# Altium PCB PowerModule.PcbDoc
Units mil, origin at the board's own origin, x right, y up, seen from the top; angles counter-clockwise.
Board outline 787.4 x 2125.98 mil, 2 copper layers (Top Layer, Bottom Layer); 46 components, 30 nets, 118 pads, 44 vias.
Unrouted connection lines stored in the file: 19.
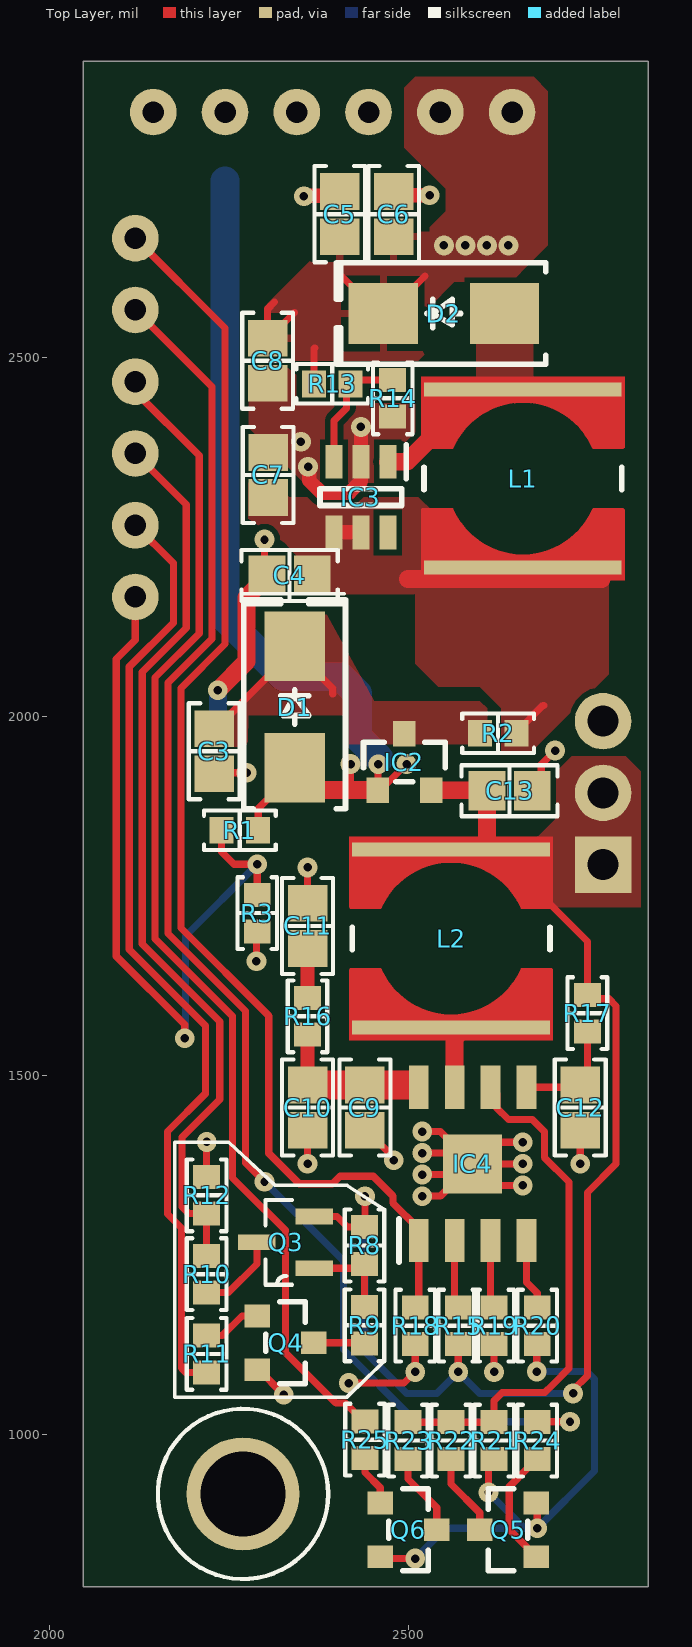
[diagram p0: Top Layer view]
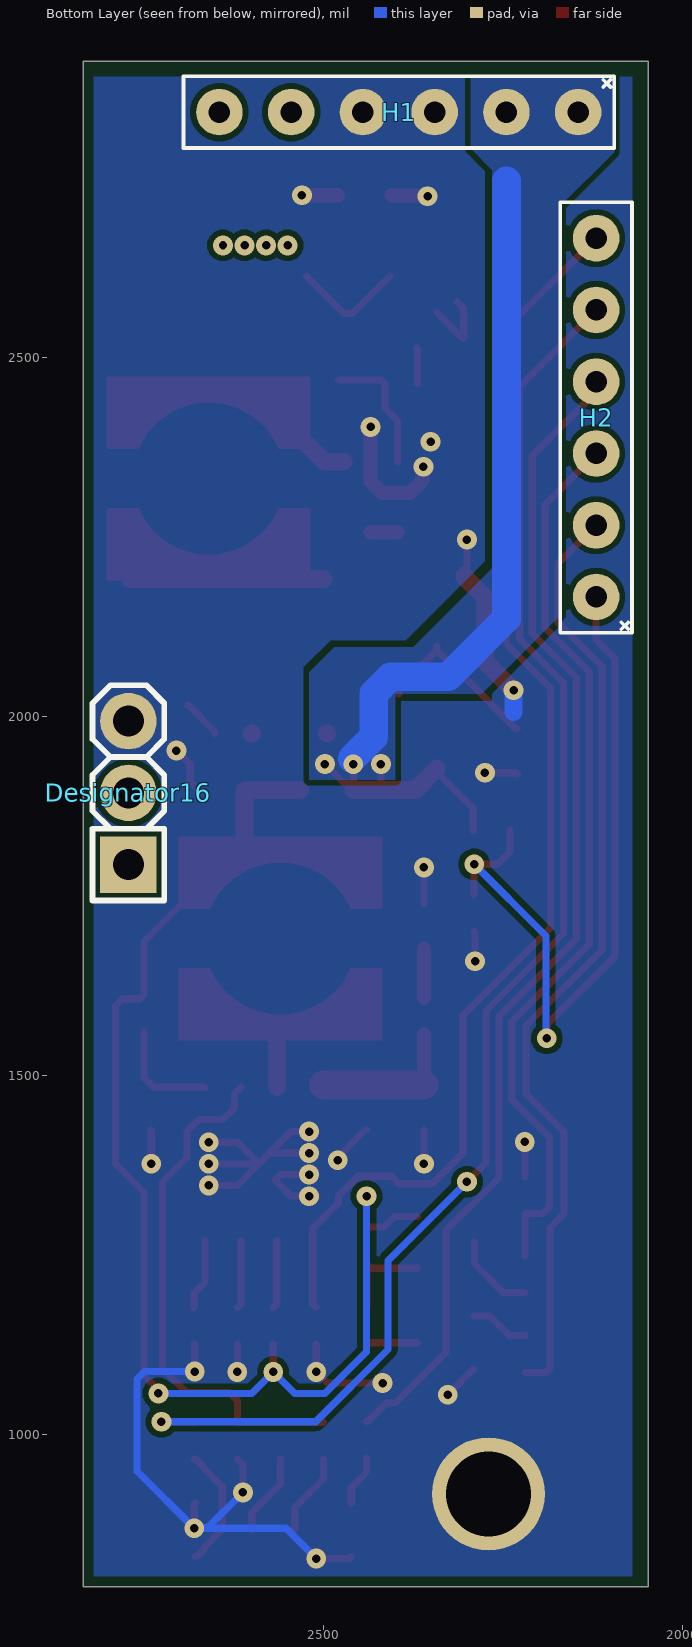
[diagram p1: Bottom Layer view, seen from below]
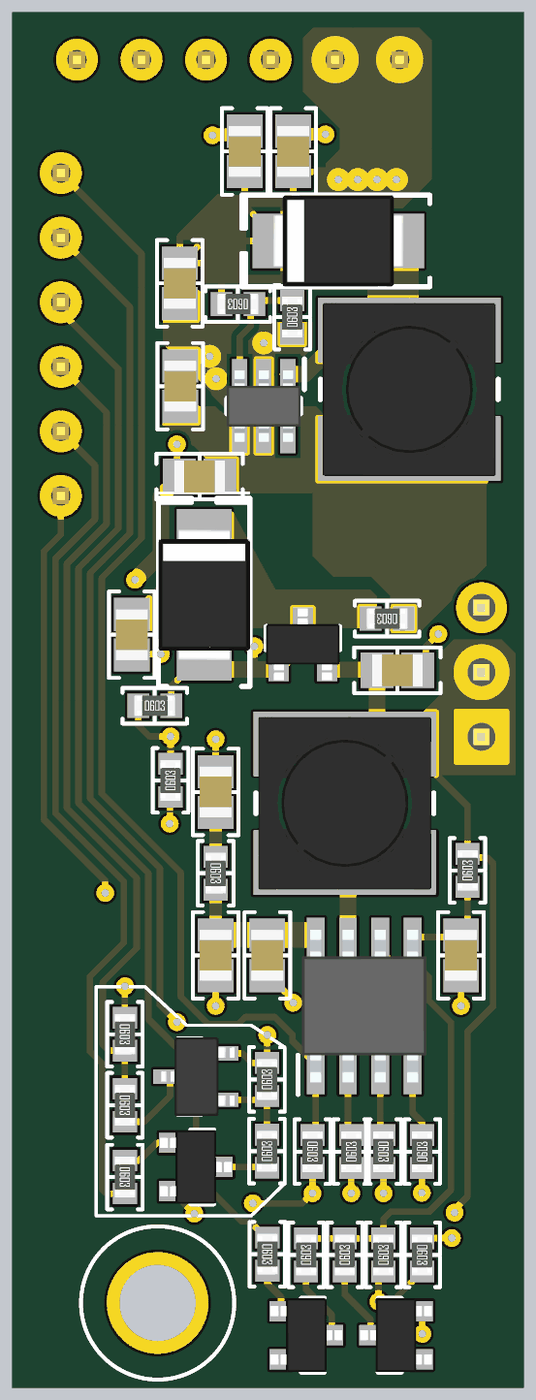
[diagram p2: 3D render of the assembled board from above, using the file's embedded part models]
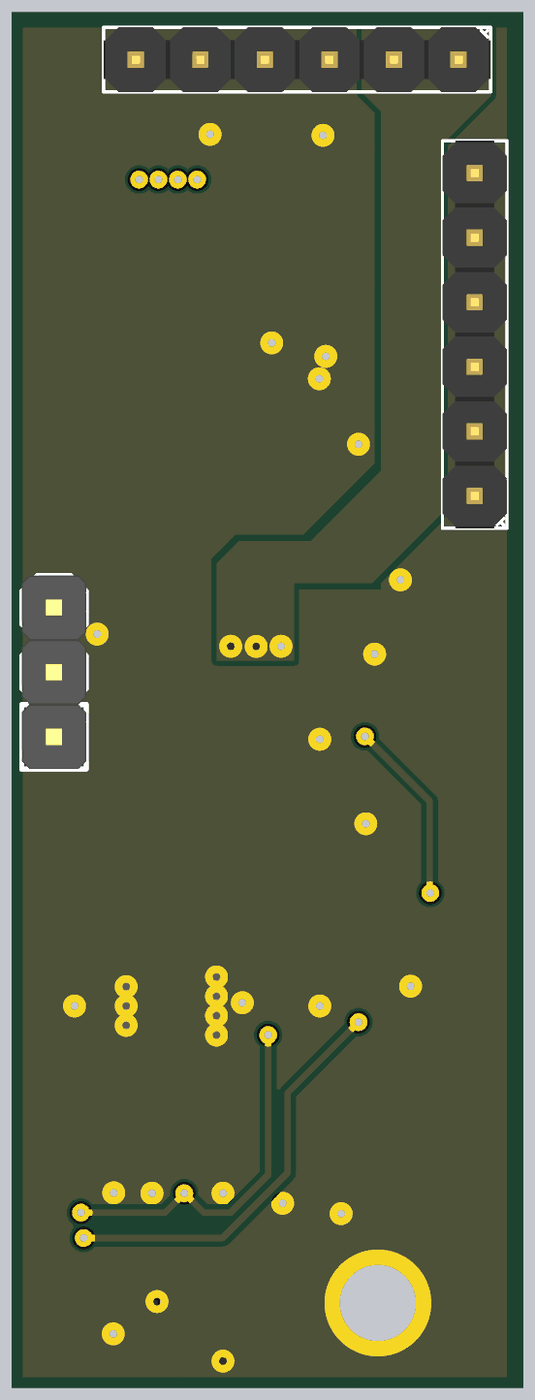
[diagram p3: 3D render of the assembled board from below, using the file's embedded part models]

## Layer stack, top to bottom
Top Solder: solder mask 0.4, Solder Resist, Dk 3.5
Top Layer: signal copper 1.4
Dielectric 1: dielectric 12.6, FR-4, Dk 4.8
Bottom Layer: signal copper 1.4
Bottom Solder: solder mask 0.4, Solder Resist, Dk 3.5

## Board outline
2047.24,787.4 2834.65,787.4 2834.65,2913.39 2047.24,2913.39

## Design rules (kind name [scope] priority, off if disabled: settings)
BoardOutlineClearance [All] p1: gap=10 ignorepadtopadclearanceinfootprint=FALSE except(0: Arc-SplitContinuation Track-SplitContinuation SMDPad-SplitContinuation THPad-SplitContinuation Via-SplitContinuation Fill-SplitContinuation Poly-SplitContinuation Region-SplitContinuation Text-SplitContinuation)
Clearance [All] p1: gap=8 ignorepadtopadclearanceinfootprint=FALSE
PolygonConnect PolygonConnect_7 [All vs IsNamedPolygon('NONET_L01_P-001')] p1: connectstyle=Direct reliefconductorwidth=10 reliefentries=4 polygonreliefangle="90 Angle" airgapwidth=10
PolygonConnect PolygonConnect_6 [All vs IsNamedPolygon('NONET_L01_P-001')] p2: thpad.connectstyle=Relief thpad.reliefconductorwidth=10 thpad.reliefentries=4 thpad.polygonreliefangle="90 Angle" thpad.airgapwidth=10 smdpad.connectstyle=Relief smdpad.reliefconductorwidth=10 smdpad.reliefentries=4 smdpad.polygonreliefangle="90 Angle" smdpad.airgapwidth=10 via.connectstyle=Direct via.reliefconductorwidth=10 via.reliefentries=4 via.polygonreliefangle="90 Angle" via.airgapwidth=10
PolygonConnect PolygonConnect_5 [All vs IsNamedPolygon('NONET_L01_P-001')] p3: thpad.connectstyle=Relief thpad.reliefconductorwidth=10 thpad.reliefentries=4 thpad.polygonreliefangle="90 Angle" thpad.airgapwidth=10 smdpad.connectstyle=Relief smdpad.reliefconductorwidth=10 smdpad.reliefentries=4 smdpad.polygonreliefangle="90 Angle" smdpad.airgapwidth=10 via.connectstyle=Direct via.reliefconductorwidth=10 via.reliefentries=4 via.polygonreliefangle="90 Angle" via.airgapwidth=10
PolygonConnect PolygonConnect_4 [All vs IsNamedPolygon('NONET_L01_P-001')] p4: thpad.connectstyle=Relief thpad.reliefconductorwidth=10 thpad.reliefentries=4 thpad.polygonreliefangle="90 Angle" thpad.airgapwidth=10 smdpad.connectstyle=Relief smdpad.reliefconductorwidth=10 smdpad.reliefentries=4 smdpad.polygonreliefangle="90 Angle" smdpad.airgapwidth=10 via.connectstyle=Direct via.reliefconductorwidth=10 via.reliefentries=4 via.polygonreliefangle="90 Angle" via.airgapwidth=10
PolygonConnect PolygonConnect_3 [All vs IsNamedPolygon('+5V_L01_P002')] p5: thpad.connectstyle=Relief thpad.reliefconductorwidth=10 thpad.reliefentries=4 thpad.polygonreliefangle="90 Angle" thpad.airgapwidth=10 smdpad.connectstyle=Relief smdpad.reliefconductorwidth=10 smdpad.reliefentries=4 smdpad.polygonreliefangle="90 Angle" smdpad.airgapwidth=10 via.connectstyle=Direct via.reliefconductorwidth=10 via.reliefentries=4 via.polygonreliefangle="90 Angle" via.airgapwidth=10
PolygonConnect PolygonConnect_2 [All vs IsNamedPolygon('NONET_L01_P-001')] p6: thpad.connectstyle=Relief thpad.reliefconductorwidth=10 thpad.reliefentries=4 thpad.polygonreliefangle="90 Angle" thpad.airgapwidth=10 smdpad.connectstyle=Relief smdpad.reliefconductorwidth=10 smdpad.reliefentries=4 smdpad.polygonreliefangle="90 Angle" smdpad.airgapwidth=10 via.connectstyle=Direct via.reliefconductorwidth=10 via.reliefentries=4 via.polygonreliefangle="90 Angle" via.airgapwidth=10
PolygonConnect PolygonConnect_1 [All vs IsNamedPolygon('+5V_L01_P002') Or IsNamedPolygon('+V_SYS_L01_P001') Or IsNamedPolygon('GND_L01_P006') Or IsNamedPolygon('NETD2_1_L01_P003')] p7: thpad.connectstyle=Relief thpad.reliefconductorwidth=10 thpad.reliefentries=4 thpad.polygonreliefangle="90 Angle" thpad.airgapwidth=10 smdpad.connectstyle=Direct smdpad.reliefconductorwidth=10 smdpad.reliefentries=4 smdpad.polygonreliefangle="90 Angle" smdpad.airgapwidth=10 via.connectstyle=Direct via.reliefconductorwidth=10 via.reliefentries=4 via.polygonreliefangle="90 Angle" via.airgapwidth=10
PolygonConnect [All] p8: connectstyle=Relief reliefconductorwidth=10 reliefentries=4 polygonreliefangle="90 Angle" airgapwidth=10
RoutingVias [All] p1: holewidth=11.81 width=27.56 viastyle="Through Hole" minholewidth=11.81 minwidth=27.56 maxholewidth=11.81 maxwidth=27.56
SolderMaskExpansion [All] p1: expansion=4 istentingtop=FALSE
Width [All] p1: maxlimit=40 minlimit=8 preferedwidth=10
30 further rules are at their usual default settings.

## Components (designator, comment, footprint, x,y, rotation, side; value= is the part's Value field where it differs from the comment)
C3 "10 µF" "CAP 0805_2012" 2229.85,1951.77 r90 top
C4 "1 µF" "CAP 0805_2012" 2334.85,2196.77 r0 top
C5 "1 µF" "CAP 0805_2012" 2404.85,2700.28 r270 top
C6 "1 µF" "CAP 0805_2012" 2479.85,2700.28 r270 top
C7 "22 µF" "CAP 0805_2012" 2304.85,2336.77 r270 top
C8 "22 µF" "CAP 0805_2012" 2304.26,2495.99 r90 top
C9 "10 µF" "CAP 0805_2012" 2439.85,1455.28 r90 top
C10 "22 µF" "CAP 0805_2012" 2359.85,1455.28 r90 top
C11 "10 µF" "CAP 0805_2012" 2359.85,1708.27 r270 top
C12 "22 µF" "CAP 0805_2012" 2739.85,1455.28 r90 top
C13 "22 µF" "CAP 0805_2012" 2641.35,1896.77 r180 top
D1 "SS24" "DO214AA SMB" 2341.95,2013.42 r90 top
D2 "SS24" "DO214AA SMB" 2549.85,2561.77 r180 top
Designator16 "Comment" "CON: PLS-3" 2771.65,1893.7 r90 bottom
H1 "arduino_header_6" header-6_male 2144.88,2842.52 r0 bottom
H2 "arduino_header_6" header-6_male 2119.85,2166.77 r90 bottom
IC2 "DMP1045U-7" "DIODES SOT-23-3" 2494.85,1936.77 r90 top
IC3 "MT3608" SOT95P280X145-6N 2434.26,2305.99 r270 top
IC4 "IP2312" SOIC127P600X165-9N 2589.85,1376.77 r90 top
L1 "3.3 µH" "BOURNS SRR6028" 2659.85,2331.77 r90 top
L2 "3.3 µH" "BOURNS SRR6028" 2559.85,1690.79 r90 top
Q3 "3906" SOT-23 2329.22,1267.4 r180 top
Q4 "MMBT3904-7-F" "DIODES SOT-23-3" 2329.22,1127.4 r0 top
Q5 "MMBT3904-7-F" "DIODES SOT-23-3" 2639.22,866.77 r180 top
Q6 "MMBT3904-7-F" "DIODES SOT-23-3" 2500.48,866.77 r0 top
R1 "10 kOhms" "RES 0603_1608" 2265.44,1841.77 r0 top
R2 "=Value" "RES 0603_1608" 2625.44,1976.77 r180 top
R3 "10 kOhms" "RES 0603_1608" 2289.85,1726.18 r90 top
R8 "10 kOhms" "RES 0603_1608" 2439.22,1262.99 r90 top
R9 "10 kOhms" "RES 0603_1608" 2439.22,1151.81 r90 top
R10 "7.5 kOhms" "RES 0603_1608" 2219.22,1222.99 r270 top
R11 "10 kOhms" "RES 0603_1608" 2219.22,1111.81 r270 top
R12 "2.7 kOhms" "RES 0603_1608" 2219.22,1332.99 r270 top
R13 "10 kOhms" "RES 0603_1608" 2394.26,2463.78 r180 top
R14 "1 kOhms" "RES 0603_1608" 2478.47,2443.71 r90 top
R15 "1 kOhms" "RES 0603_1608" 2569.85,1151.18 r90 top
R16 "2 Ohms" "RES 0603_1608" 2359.85,1582.36 r270 top
R17 "500 mOhms" "RES 0603_1608" 2749.85,1586.77 r90 top
R18 "1 kOhms" "RES 0603_1608" 2509.85,1151.18 r270 top
R19 "1 kOhms" "RES 0603_1608" 2619.85,1151.18 r270 top
R20 "51 kOhms" "RES 0603_1608" 2679.85,1151.18 r90 top
R21 "330 kOhms" "RES 0603_1608" 2619.85,991.18 r90 top
R22 "220 kOhms" "RES 0603_1608" 2559.85,991.18 r90 top
R23 "51 kOhms" "RES 0603_1608" 2499.85,991.18 r90 top
R24 "10 kOhms" "RES 0603_1608" 2679.85,991.18 r270 top
R25 "10 kOhms" "RES 0603_1608" 2439.85,992.36 r270 top

## Footprints (in the part's own frame and the unit in brackets; to place one, negate y for a bottom-side part, rotate by r counter-clockwise, add the part's x,y. Pads: shape width x height; smd on the part's side, far side on the other; paste and mask are expansions set on the pad)
"BOURNS SRR6028" [mm] "Precision Wire Wound Inductor, 2-Leads, Body 6.80x6.80mm, IPC Medium Density"
  rect 0.5x7 smd: 1(-3.15,0) 2(3.15,0)
  Top Layer region: -3.6,3.6 -1.1,3.6 -1.1,2.5 -1.4,2.4 -1.7,2.1 -1.9,2 -2.1,1.7 -2.3,1.4 -2.5,1 -2.6,0.7 -2.7,0.3 -2.7,0 -3.6,0
  Top Layer region: -3.6,-3.6 -1.1,-3.6 -1.1,-2.5 -1.4,-2.4 -1.7,-2.1 -1.9,-2 -2.1,-1.7 -2.3,-1.4 -2.5,-1 -2.6,-0.7 -2.7,-0.3 -2.7,0 -3.6,0
  Top Layer region: 3.6,-3.6 1.1,-3.6 1.1,-2.5 1.4,-2.4 1.7,-2.1 1.9,-2 2.1,-1.7 2.3,-1.4 2.5,-1 2.6,-0.7 2.7,-0.3 2.7,0 3.6,0
  Top Layer region: 3.6,3.6 1.1,3.6 1.1,2.5 1.4,2.4 1.7,2.1 1.9,2 2.1,1.7 2.3,1.4 2.5,1 2.6,0.7 2.7,0.3 2.7,0 3.6,0
  Top Layer lines w0.1: -1.1,3.55 -1.1,2.5 ccw(c0,0) -2.731,0 ccw(c0,0) -1.1,-2.5 -1.1,-3.55 ; 1.1,3.55 1.1,2.5 cw(c0,0) 2.731,0 cw(c0,0) 1.1,-2.5 1.1,-3.55
  silkscreen extent -0.4,-3.5 0.4,3.5, body extent -3.4,-3.4 3.4,3.4, height 2.8
"CAP 0805_2012" [mm] "Chip Capacitor, 2-Leads, Body 2.00x1.20mm, IPC Medium Density"
  rect 1.3x1.4 smd: 1(-0.8,0) 2(0.8,0)
  silkscreen extent -1.7,-0.9 1.7,0.9, body extent -1,-0.64 1,0.64, height 1.26
"CON: PLS-3" [mm]
  rect 2x2 hole 1.1: 1(-2.54,0)
  round 2 hole 1.1: 2(0,0) 3(2.54,0)
  silkscreen extent -3.81,-1.27 3.81,1.27, body extent -3.81,-1.27 3.81,1.27, height 8.54
"DIODES SOT-23-3" [mm] "SOT23, 3-Leads, Body 2.90x2.40mm, Pitch 0.95mm, IPC Medium Density"
  rect 0.9x0.8 smd: 1(-1,0.95) 2(-1,-0.95) 3(1,0)
  silkscreen extent -0.7,-1.45 0.7,1.45, body extent -1.41,-1.45 1.41,1.45, height 1.5
"DO214AA SMB" [mm] "Molded Diode, 2-Leads, Body 4.31x3.62mm, IPC Medium Density"
  rect 2.45x2.15 smd: 1(-2.15,0) 2(2.15,0)
  silkscreen extent -3.6,-1.8 3.8,1.8, body extent -2.6,-1.8 2.6,1.8, height 2.4
header-6_male [mil]
  round 65 hole 30: 1(0,0) 2(100,0) 3(200,0) 4(300,0) 5(400,0) 6(500,0)
  silkscreen extent -50,-50 550,50, body extent -50,-50 550,50, height 339
"RES 0603_1608" [mm] "Chip Resistor, 2-Leads, Body 1.60x0.80mm, IPC Medium Density"
  rect 0.85x0.95 smd: 1(-0.65,0) 2(0.65,0)
  silkscreen extent -1.27,-0.7 1.27,0.7, body extent -0.8,-0.4 0.8,0.4, height 0.45
SOIC127P600X165-9N [mm]
  rect 1.525x0.7 smd: 1(-2.712,1.905) 2(-2.712,0.635) 3(-2.712,-0.635) 4(-2.712,-1.905) 5(2.712,-1.905) 6(2.712,-0.635) 7(2.712,0.635) 8(2.712,1.905)
  rect 2.09x2.09 smd: 9(0,0)
  silkscreen extent -3.47,2.61 -1.95,2.61, body extent -3,-2.45 3,2.45, height 1.65
SOT95P280X145-6N [mm]
  rect 1.2x0.6 smd: 1(-1.25,0.95) 2(-1.25,0) 3(-1.25,-0.95) 4(1.25,-0.95) 5(1.25,0) 6(1.25,0.95)
  silkscreen extent -1.85,-1.45 0.3,1.6, body extent -1.4,-1.45 1.4,1.45, height 1.45
SOT-23 [mil]
  rect 52x22 smd: 1(-40,36) 2(-40,-36) 3(40,0)
  silkscreen extent -9,-59 28,59, body extent -60,-61 58,61, height 57

## Part data
C3 C9 C11: library part C0805C106K8PAC7800, "CAP CER 10UF 10V X5R 0805", Device Package="0805 (2012 Metric)", Manufacturer=KEMET, Operating Temperature="-55°C ~ 85°C", Supplier Part Number 1=399-C0805C106K8PAC7800CT-ND, Temperature Coefficient=X5R, Tolerance=±10%, Voltage - Rated=10V, Applications="Bypass, Decoupling", Capacitance="10 µF", ComponentLink1Description=Datasheet, ComponentLink1URL=https://connect.kemet.com:7667/gateway/IntelliData-ComponentDocumentation/1.0/download/datasheet/C0805C106K8PACTU, ComponentLink2Description="DigiKey Link", ComponentLink2URL=https://www.digikey.com/en/products/detail/kemet/C0805C106K8PAC7800/1090830, LastUpdated="9/14/2022 7:51:56 AM", Lifecycle Status=Active, Minimum Order=1, Mounting Type="Surface Mount, MLCC", Package / Case="0805 (2012 Metric)", Packaging=TapeAndReel, Part Number=C0805C106K8PAC7800, Part Status=Active, PartId=44790, Price=0.02, Series="SMD Comm X5R", Size / Dimension="0.079\" L x 0.049\" W (2.00mm x 1.25mm)", Supplier 1=DigiKey, Thickness (Max)="0.055\" (1.40mm)"
C4 C5 C6: library part C0805C105K4RAC7800, "CAP CER 1UF 16V X7R 0805", Device Package="0805 (2012 Metric)", Manufacturer=KEMET, Operating Temperature="-55°C ~ 125°C", Supplier Part Number 1=399-C0805C105K4RAC7800CT-ND, Temperature Coefficient=X7R, Tolerance=±10%, Voltage - Rated=16V, Applications="Bypass, Decoupling", Capacitance="1 µF", ComponentLink1Description=Datasheet, ComponentLink1URL=https://api.kemet.com/component-edge/download/datasheet/C0805C105K4RACTU.pdf, ComponentLink2Description="DigiKey Link", ComponentLink2URL=https://www.digikey.com/en/products/detail/kemet/C0805C105K4RAC7800/416047, LastUpdated="9/19/2022 1:03:30 PM", Lifecycle Status=Active, Minimum Order=1, Mounting Type="Surface Mount, MLCC", Package / Case="0805 (2012 Metric)", Packaging=TapeAndReel, Part Number=C0805C105K4RAC7800, Part Status=Active, PartId=32075, Price=0.01, Series="SMD Comm X7R", Size / Dimension="0.079\" L x 0.049\" W (2.00mm x 1.25mm)", Supplier 1=DigiKey, Thickness (Max)="0.039\" (1.00mm)"
C7 C8 C10 C12 C13: library part GRM21BR61E226ME44K, "CAP CER 22UF 25V X5R 0805", Device Package="0805 (2012 Metric)", Manufacturer="Murata Electronics", Operating Temperature="-55°C ~ 85°C", Supplier Part Number 1=490-14661-1-ND, Temperature Coefficient=X5R, Tolerance=±20%, Voltage - Rated=25V, Applications="General Purpose", Capacitance="22 µF", ComponentLink1Description=Datasheet, ComponentLink1URL=https://search.murata.co.jp/Ceramy/image/img/A01X/G101/ENG/GRM21BR61E226ME44-01.pdf, ComponentLink2Description="DigiKey Link", ComponentLink2URL=https://www.digikey.com/en/products/detail/murata-electronics/GRM21BR61E226ME44K/4905534, LastUpdated="2/9/2024 8:15:53 PM", Lifecycle Status=Active, Minimum Order=1, Mounting Type="Surface Mount, MLCC", Package / Case="0805 (2012 Metric)", Packaging=TapeAndReel, Part Number=GRM21BR61E226ME44K, Part Status=Active, PartId=39870, Price=0.05, Series=GRM, Size / Dimension="0.079\" L x 0.049\" W (2.00mm x 1.25mm)", Supplier 1=DigiKey, Thickness (Max)="0.057\" (1.45mm)"
D1 D2: "DIODE SCHOTTKY 40V 2A DO214AA", Current - Average Rectified (Io)=2A, Current - Reverse Leakage @ Vr="400µA @ 40V", Manufacturer="ON Semiconductor", Operating Temperature - Junction="-65°C ~ 125°C", Package / Case="DO-214AA, SMB", Supplier Device Package="DO-214AA (SMB)", Supplier Part Number 1=SS24FSCT-ND, Voltage - DC Reverse (Vr) (Max)=40V, Voltage - Forward (Vf) (Max) @ If="500mV @ 2A", ComponentLink1Description=Datasheet, ComponentLink1URL=https://www.onsemi.com/pub/Collateral/SS29-D.pdf, ComponentLink2Description="DigiKey Link", ComponentLink2URL=http://digikey.com/product-detail/en/on-semiconductor/SS24/SS24FSCT-ND/1626273, Diode Type=Schottky, LastUpdated="2/8/2024 9:26:46 PM", Lifecycle Status=Active, Minimum Order=1, Mounting Type="Surface Mount", Packaging=TapeAndReel, Part Number=SS24, Part Status=Active, PartId=1394, Price=0.10, Series=-, Speed="Fast Recovery =< 500ns, > 200mA (Io)", Supplier 1=DigiKey
IC2: "MOSFET P-CH 12V 4A SOT23", Current - Continuous Drain (Id) @ 25°C="4A (Ta)", Drain to Source Voltage (Vdss)="12 V", Drive Voltage (Max Rds On,  Min Rds On)="1.8V, 4.5V", Input Capacitance (Ciss) (Max) @ Vds="1357 pF @ 10 V", Manufacturer="Diodes Incorporated", Operating Temperature="-55°C ~ 150°C (TJ)", Package / Case="TO-236-3, SC-59, SOT-23-3", Power Dissipation (Max)="800mW (Ta)", Supplier Device Package=SOT-23-3, Supplier Part Number 1=DMP1045U-7DICT-ND, ComponentLink1Description=Datasheet, ComponentLink1URL=https://www.diodes.com/assets/Datasheets/DMP1045U.pdf, ComponentLink2Description="DigiKey Link", ComponentLink2URL=https://www.digikey.com/en/products/detail/diodes-incorporated/DMP1045U-7/4249936, FET Type=P-Channel, Gate Charge (Qg) (Max) @ Vgs="15.8 nC @ 4.5 V", LastUpdated="2/8/2024 9:46:13 PM", Lifecycle Status=Active, Minimum Order=1, Mounting Type="Surface Mount", Packaging=TapeAndReel, Part Number=DMP1045U-7, Part Status=Active, Price=0.07, Rds On (Max) @ Id, Vgs="31mOhm @ 4A, 4.5V", Series=-, Supplier 1=DigiKey, Technology="MOSFET (Metal Oxide)", Vgs (Max)=±8V, Vgs(th) (Max) @ Id="1V @ 250µA"
IC3: "Integrated Circuit", Manufacturer_Name=Aerosemi, Datasheet Link=https://www.olimex.com/Products/Breadboarding/BB-PWR-3608/resources/MT3608.pdf, Height=1.45mm, Manufacturer_Part_Number=MT3608
IC4: "Integrated Circuit", Manufacturer_Name=INJOINIC, Datasheet Link=http://www.injoinic.com/wwwroot/uploads/files/20230913/623558e526750db62e25e32800f94a6b.pdf, Height=1.65mm, Manufacturer_Part_Number=IP2312
L1 L2: library part SRR6028-3R3Y, "FIXED IND 3.3UH 2.5A 28 MOHM SMD", Current - Saturation=2.6A, Current Rating (Amps)="2.5 A", DC Resistance (DCR)="28mOhm Max", Device Package=Nonstandard, Frequency - Self Resonant=45MHz, Inductance Frequency - Test="100 kHz", Manufacturer="Bourns Inc.", Operating Temperature="-40°C ~ 125°C", Q @ Freq="10 @ 7.96MHz", Supplier Part Number 1=118-SRR6028-3R3YCT-ND, Tolerance=±30%, ComponentLink1Description=Datasheet, ComponentLink1URL=https://www.bourns.com/docs/Product-Datasheets/SRR6028.pdf, ComponentLink2Description="DigiKey Link", ComponentLink2URL=https://www.digikey.com/en/products/detail/bourns-inc/SRR6028-3R3Y/1970369, Height - Seated (Max)="0.118\" (3.00mm)", Inductance="3.3 µH", LastUpdated="2/8/2024 9:34:55 PM", Lifecycle Status=Active, Material - Core=Ferrite, Minimum Order=1, Mounting Type="Surface Mount", Package / Case=Nonstandard, Packaging=TapeAndReel, Part Number=SRR6028-3R3Y, Part Status=Active, PartId=57, Price=0.31, Series=SRR6028, Shielding=Shielded, Size / Dimension="0.268\" L x 0.268\" W (6.80mm x 6.80mm)", Supplier 1=DigiKey, Type="Drum Core, Wirewound"
Q3: library part MMBT3906
Q4 Q5 Q6: "TRANS NPN 40V 0.2A SOT23-3", Current - Collector (Ic) (Max)="200 mA", Current - Collector Cutoff (Max)="50nA (ICBO)", DC Current Gain (hFE) (Min) @ Ic, Vce="100 @ 10mA, 1V", Frequency - Transition=300MHz, Manufacturer="Diodes Incorporated", Operating Temperature="-55°C ~ 150°C (TJ)", Package / Case="TO-236-3, SC-59, SOT-23-3", Power - Max="300 mW", Supplier Device Package=SOT-23-3, Supplier Part Number 1=MMBT3904-FDICT-ND, Voltage - Collector Emitter Breakdown (Max)="40 V", ComponentLink1Description=Datasheet, ComponentLink1URL=https://www.diodes.com/assets/Datasheets/ds30036.pdf, ComponentLink2Description="DigiKey Link", ComponentLink2URL=https://www.digikey.com/en/products/detail/diodes-incorporated/MMBT3904-7-F/814494, LastUpdated="2/8/2024 9:54:04 PM", Lifecycle Status=Active, Minimum Order=1, Mounting Type="Surface Mount", Packaging=TapeAndReel, Part Number=MMBT3904-7-F, Part Status=Active, PartId=85, Price=0.01, Series=-, Supplier 1=DigiKey, Transistor Type=NPN, Vce Saturation (Max) @ Ib, Ic="300mV @ 5mA, 50mA"
R1 R3 R8 R9 R11 R13 R24 R25: library part RT0603FRE0710KL, "RES SMD 10K OHM 1% 1/10W 0603", Device Package="0603 (1608 Metric)", Manufacturer=Yageo, Operating Temperature="-55°C ~ 155°C", Power (Watts)="0.1W, 1/10W", Supplier Device Package=0603, Supplier Part Number 1=YAG2321CT-ND, Temperature Coefficient=±50ppm/°C, Tolerance=±1%, ComponentLink1Description=Datasheet, ComponentLink1URL=https://www.yageo.com/upload/media/product/productsearch/datasheet/rchip/PYu-RT_1-to-0.01_RoHS_L_11.pdf, ComponentLink2Description="DigiKey Link", ComponentLink2URL=http://digikey.com/product-detail/en/yageo/RT0603FRE0710KL/YAG2321CT-ND/5252435, Composition="Thin Film", Height - Seated (Max)="0.022\" (0.55mm)", LastUpdated="9/2/2020 1:10:23 AM", Lifecycle Status=Active, Minimum Order=1, Number of Terminations=2, Package / Case="0603 (1608 Metric)", Packaging=TapeAndReel, Part Number=RT0603FRE0710KL, Part Status=Active, PartId=5671, Price=0.01, Resistance="10 kOhms", Series=RT, Size / Dimension="0.063\" L x 0.031\" W (1.60mm x 0.80mm)", Supplier 1=DigiKey
R2: library part RCA06030000ZSEA, "RES SMD 0 OHM JUMPER 1/10W 0603", Device Package="0603 (1608 Metric)", Manufacturer="Vishay Dale", Operating Temperature="-55°C ~ 155°C", Power (Watts)="0.1W, 1/10W", Ratings=AEC-Q200, Supplier Device Package=0603, Supplier Part Number 1=541-2192-1-ND, Tolerance=Jumper, ComponentLink1Description=Datasheet, ComponentLink1URL=http://www.vishay.com/docs/20037/rcae3.pdf, ComponentLink2Description="DigiKey Link", ComponentLink2URL=http://digikey.com/product-detail/en/vishay-dale/RCA06030000ZSEA/541-2192-1-ND/4946845, Composition="Thick Film", Features="Anti-Sulfur, Automotive AEC-Q200", Height - Seated (Max)="0.020\" (0.50mm)", LastUpdated="9/2/2020 1:10:23 AM", Lifecycle Status=Active, Minimum Order=1, Number of Terminations=2, Package / Case="0603 (1608 Metric)", Packaging=TapeAndReel, Part Number=RCA06030000ZSEA, Part Status=Active, PartId=5740, Price=0.01, Series=RCA, Size / Dimension="0.061\" L x 0.033\" W (1.55mm x 0.85mm)", Supplier 1=DigiKey
R10: library part RC0603FR-077K5L, "RES 7.5K OHM 1% 1/10W 0603", Device Package="0603 (1608 Metric)", Manufacturer=Yageo, Operating Temperature="-55°C ~ 155°C", Power (Watts)="0.1W, 1/10W", Supplier Device Package=0603, Supplier Part Number 1=311-7.50KHRCT-ND, Temperature Coefficient=±100ppm/°C, Tolerance=±1%, ComponentLink1Description=Datasheet, ComponentLink1URL=https://www.yageo.com/upload/media/product/productsearch/datasheet/rchip/PYu-RC_Group_51_RoHS_L_10.pdf, ComponentLink2Description="DigiKey Link", ComponentLink2URL=https://www.digikey.com/en/products/detail/yageo/RC0603FR-077K5L/727366, Composition="Thick Film", Features="Moisture Resistant", Height - Seated (Max)="0.022\" (0.55mm)", LastUpdated="2/9/2024 8:42:41 PM", Lifecycle Status=Active, Minimum Order=1, Number of Terminations=2, Package / Case="0603 (1608 Metric)", Packaging=CutTape, Part Number=RC0603FR-077K5L, Part Status=Active, PartId=19041, Price=0.01, Resistance="7.5 kOhms", Series=RC_L, Size / Dimension="0.063\" L x 0.031\" W (1.60mm x 0.80mm)", Supplier 1=DigiKey
R12: library part RC0603FR-072K7L, "RES 2.7K OHM 1% 1/10W 0603", Device Package="0603 (1608 Metric)", Manufacturer=Yageo, Operating Temperature="-55°C ~ 155°C", Power (Watts)="0.1W, 1/10W", Supplier Device Package=0603, Supplier Part Number 1=311-2.70KHRCT-ND, Temperature Coefficient=±100ppm/°C, Tolerance=±1%, ComponentLink1Description=Datasheet, ComponentLink1URL=https://www.yageo.com/upload/media/product/productsearch/datasheet/rchip/PYu-RC_Group_51_RoHS_L_10.pdf, ComponentLink2Description="DigiKey Link", ComponentLink2URL=https://www.digikey.com/en/products/detail/yageo/RC0603FR-072K7L/727032, Composition="Thick Film", Features="Moisture Resistant", Height - Seated (Max)="0.022\" (0.55mm)", LastUpdated="2/9/2024 8:42:41 PM", Lifecycle Status=Active, Minimum Order=1, Number of Terminations=2, Package / Case="0603 (1608 Metric)", Packaging=CutTape, Part Number=RC0603FR-072K7L, Part Status=Active, PartId=19013, Price=0.01, Resistance="2.7 kOhms", Series=RC_L, Size / Dimension="0.063\" L x 0.031\" W (1.60mm x 0.80mm)", Supplier 1=DigiKey
R14: library part RT0603FRE071KL, "RES SMD 1K OHM 1% 1/10W 0603", Device Package="0603 (1608 Metric)", Manufacturer=Yageo, Operating Temperature="-55°C ~ 155°C", Power (Watts)="0.1W, 1/10W", Supplier Device Package=0603, Supplier Part Number 1=YAG2323CT-ND, Temperature Coefficient=±50ppm/°C, Tolerance=±1%, ComponentLink1Description=Datasheet, ComponentLink1URL=https://www.yageo.com/upload/media/product/productsearch/datasheet/rchip/PYu-RT_1-to-0.01_RoHS_L_11.pdf, ComponentLink2Description="DigiKey Link", ComponentLink2URL=https://www.digikey.com/en/products/detail/yageo/RT0603FRE071KL/1075188, Composition="Thin Film", Height - Seated (Max)="0.022\" (0.55mm)", LastUpdated="9/19/2022 1:22:31 PM", Lifecycle Status=Active, Minimum Order=1, Number of Terminations=2, Package / Case="0603 (1608 Metric)", Packaging=TapeAndReel, Part Number=RT0603FRE071KL, Part Status=Active, PartId=5672, Price=0.01, Resistance="1 kOhms", Series=RT, Size / Dimension="0.063\" L x 0.031\" W (1.60mm x 0.80mm)", Supplier 1=DigiKey
R15 R18 R19: library part RC0603JR-071KP, "RES 1K OHM 5% 1/10W 0603", Device Package="0603 (1608 Metric)", Manufacturer=Yageo, Operating Temperature="-55°C ~ 155°C", Power (Watts)="0.1W, 1/10W", Ratings="7C1 RoHS w/out Exemption (100% Pb-Free)", Supplier Device Package=0603, Supplier Part Number 1=YAG1311CT-ND, Temperature Coefficient=±100ppm/°C, Tolerance=±5%, ComponentLink1Description=Datasheet, ComponentLink1URL=http://www.yageo.com/NewPortal/yageodocoutput?fileName=/pdf/R-Chip/PYu-RC_51_RoHS_P_0.pdf, ComponentLink2Description="DigiKey Link", ComponentLink2URL=https://www.digikey.com/en/products/detail/yageo/RC0603JR-071KP/4935326, Composition="Thick Film", Features="Moisture Resistant", Height - Seated (Max)="0.022\" (0.55mm)", LastUpdated="2/9/2024 8:43:09 PM", Lifecycle Status=Active, Minimum Order=1, Number of Terminations=2, Package / Case="0603 (1608 Metric)", Packaging=TapeAndReel, Part Number=RC0603JR-071KP, Part Status=Active, PartId=11731, Price=0.01, Resistance="1 kOhms", Series=RC_P, Size / Dimension="0.063\" L x 0.031\" W (1.60mm x 0.80mm)", Supplier 1=DigiKey
R16: library part RC0603FR-072RL, "RES 2 OHM 1% 1/10W 0603", Device Package="0603 (1608 Metric)", Manufacturer=Yageo, Operating Temperature="-55°C ~ 155°C", Power (Watts)="0.1W, 1/10W", Supplier Device Package=0603, Supplier Part Number 1=311-2.00HRCT-ND, Temperature Coefficient=±200ppm/°C, Tolerance=±1%, ComponentLink1Description=Datasheet, ComponentLink1URL=https://www.yageo.com/upload/media/product/productsearch/datasheet/rchip/PYu-RC_Group_51_RoHS_L_10.pdf, ComponentLink2Description="DigiKey Link", ComponentLink2URL=https://www.digikey.com/en/products/detail/yageo/RC0603FR-072RL/727008, Composition="Thick Film", Features="Moisture Resistant", Height - Seated (Max)="0.022\" (0.55mm)", LastUpdated="2/9/2024 8:43:04 PM", Lifecycle Status=Active, Minimum Order=1, Number of Terminations=2, Package / Case="0603 (1608 Metric)", Packaging=TapeAndReel, Part Number=RC0603FR-072RL, Part Status=Active, PartId=12910, Price=0.01, Resistance="2 Ohms", Series=RC_L, Size / Dimension="0.063\" L x 0.031\" W (1.60mm x 0.80mm)", Supplier 1=DigiKey
R17: library part RL0603FR-070R5L, "RES 0.5 OHM 1% 1/10W 0603", Device Package="0603 (1608 Metric)", Manufacturer=Yageo, Operating Temperature="-55°C ~ 155°C", Power (Watts)="0.1W, 1/10W", Ratings=AEC-Q200, Supplier Device Package=0603, Supplier Part Number 1=311-.5QCT-ND, Temperature Coefficient=±800ppm/°C, Tolerance=±1%, ComponentLink1Description=Datasheet, ComponentLink1URL=http://www.yageo.com/documents/recent/PYu-RL_Group_521_RoHS_L_2.pdf, ComponentLink2Description="DigiKey Link", ComponentLink2URL=https://www.digikey.com/en/products/detail/yageo/RL0603FR-070R5L/3885517, Composition="Thick Film", Features="Automotive AEC-Q200, Current Sense, Moisture Resistant", Height - Seated (Max)="0.022\" (0.55mm)", LastUpdated="2/9/2024 8:43:08 PM", Lifecycle Status=Active, Minimum Order=1, Number of Terminations=2, Package / Case="0603 (1608 Metric)", Packaging=TapeAndReel, Part Number=RL0603FR-070R5L, Part Status=Active, PartId=12049, Price=0.03, Resistance="500 mOhms", Series=RL, Size / Dimension="0.063\" L x 0.031\" W (1.60mm x 0.80mm)", Supplier 1=DigiKey
R20 R23: library part RC0603FR-0751KL, "RES 51K OHM 1% 1/10W 0603", Device Package="0603 (1608 Metric)", Manufacturer=Yageo, Operating Temperature="-55°C ~ 155°C", Power (Watts)="0.1W, 1/10W", Supplier Device Package=0603, Supplier Part Number 1=311-51.0KHRCT-ND, Temperature Coefficient=±100ppm/°C, Tolerance=±1%, ComponentLink1Description=Datasheet, ComponentLink1URL=https://www.yageo.com/upload/media/product/productsearch/datasheet/rchip/PYu-RC_Group_51_RoHS_L_10.pdf, ComponentLink2Description="DigiKey Link", ComponentLink2URL=https://www.digikey.com/en/products/detail/yageo/RC0603FR-0751KL/727282, Composition="Thick Film", Features="Moisture Resistant", Height - Seated (Max)="0.022\" (0.55mm)", LastUpdated="2/9/2024 8:42:42 PM", Lifecycle Status=Active, Minimum Order=1, Number of Terminations=2, Package / Case="0603 (1608 Metric)", Packaging=CutTape, Part Number=RC0603FR-0751KL, Part Status=Active, PartId=18942, Price=0.01, Resistance="51 kOhms", Series=RC_L, Size / Dimension="0.063\" L x 0.031\" W (1.60mm x 0.80mm)", Supplier 1=DigiKey
R21: library part RC0603JR-07330KL, "RES 330K OHM 5% 1/10W 0603", Device Package="0603 (1608 Metric)", Manufacturer=Yageo, Operating Temperature="-55°C ~ 155°C", Power (Watts)="0.1W, 1/10W", Supplier Device Package=0603, Supplier Part Number 1=311-330KGRCT-ND, Temperature Coefficient=±100ppm/°C, Tolerance=±5%, ComponentLink1Description=Datasheet, ComponentLink1URL=https://www.yageo.com/upload/media/product/productsearch/datasheet/rchip/PYu-RC_Group_51_RoHS_L_10.pdf, ComponentLink2Description="DigiKey Link", ComponentLink2URL=https://www.digikey.com/en/products/detail/yageo/RC0603JR-07330KL/726770, Composition="Thick Film", Features="Moisture Resistant", Height - Seated (Max)="0.022\" (0.55mm)", LastUpdated="2/9/2024 8:42:48 PM", Lifecycle Status=Active, Minimum Order=1, Number of Terminations=2, Package / Case="0603 (1608 Metric)", Packaging=CutTape, Part Number=RC0603JR-07330KL, Part Status=Active, PartId=17213, Price=0.01, Resistance="330 kOhms", Series=RC_L, Size / Dimension="0.063\" L x 0.031\" W (1.60mm x 0.80mm)", Supplier 1=DigiKey
R22: library part RC0603FR-07220KL, "RES 220K OHM 1% 1/10W 0603", Device Package="0603 (1608 Metric)", Manufacturer=Yageo, Operating Temperature="-55°C ~ 155°C", Power (Watts)="0.1W, 1/10W", Supplier Device Package=0603, Supplier Part Number 1=311-220KHRCT-ND, Temperature Coefficient=±100ppm/°C, Tolerance=±1%, ComponentLink1Description=Datasheet, ComponentLink1URL=https://www.yageo.com/upload/media/product/productsearch/datasheet/rchip/PYu-RC_Group_51_RoHS_L_10.pdf, ComponentLink2Description="DigiKey Link", ComponentLink2URL=https://www.digikey.com/en/products/detail/yageo/RC0603FR-07220KL/727062, Composition="Thick Film", Features="Moisture Resistant", Height - Seated (Max)="0.022\" (0.55mm)", LastUpdated="2/9/2024 8:42:41 PM", Lifecycle Status=Active, Minimum Order=1, Number of Terminations=2, Package / Case="0603 (1608 Metric)", Packaging=CutTape, Part Number=RC0603FR-07220KL, Part Status=Active, PartId=19015, Price=0.01, Resistance="220 kOhms", Series=RC_L, Size / Dimension="0.063\" L x 0.031\" W (1.60mm x 0.80mm)", Supplier 1=DigiKey

## Free pads (board coordinates)
  round 157.48 hole 118.11: qq(2269.85,916.77)

## Via types
v1: diameter 27.56, hole 11.81, Top Layer to Bottom Layer, 44 vias

## Nets (pads, with @x,y where several pads share a name; then routed paths per layer and width w, separated by ;. In a path a pad name is that pad's centre, name@x,y a point inside that pad or via, vN(x,y) a via of type N, cw(c..) or ccw(c..) an arc to the next point about the centre after c; other vN are vias at no path point)
+5V: C5.2 C6.2 C8.2 D2.2 H1.5 H1.6 R13.2 | length 316.8
  Top Layer w10: 2313.72,2577.81 2304.26,2568.35 C8.2 2306.23,2527.48 2341.82,2563.07 ; R13.2 2368.67,2512.6 2369.85,2513.78 ; 2406.98,2614.1 2459.3,2561.77 D2.2 2471.11,2561.77 2523.44,2614.1
  other v1: 2549.85,2656.77 2579.85,2656.77 2609.85,2656.77 2639.85,2656.77
+V_SYS: C4.2 C7.2 IC3.4 IC3.5 L1.1 R2.1 | length 410.8
  Top Layer w10: R2.1 2651.03,1978.74 2688.04,2015.75 2688.98,2015.75
  Top Layer w20: IC3.4 IC3.5
  Top Layer w25: 2499.85,2191.77 2769.85,2191.77 ; L1.1@2674.85,2212.76 2712.2,2212.76 L1.1@2719.85,2205.1
ADC_ON: H2.3 R10.1 R12.2 | length 1268.5
  Top Layer w10: H2.3 2190.85,2295.77 2190.85,2123.52 2129.38,2062.04 2129.38,1683.06 2237.43,1575.01 2237.43,1466.31 2184.85,1413.73 2184.85,1316.77 2194.22,1307.4 R12.2 R10.1
ADC_VBAT: H2.2 R11.2 | length 1333.3
  Top Layer w10: H2.2 2172.85,2213.77 2172.85,2130.97 2111.38,2069.5 2111.38,1675.6 2217.43,1569.55 2217.43,1474.59 2164.85,1422.02 2164.85,1306.77 2184.19,1287.44 2184.19,1092.08 2190.05,1086.22 R11.2
ADC_VUSB: H2.1 R1.1 R3.2 | length 1079.6
  Top Layer w10: H2.1 2119.85,2106.77 2093.38,2080.3 2093.38,1666.09 2188.65,1570.82 v1(2188.65,1551.77) ; R1.1 2239.85,1811.77 2257.35,1794.27 v1(2289.85,1794.27) R3.2
  Bottom Layer w10: v1(2188.65,1551.77) 2189.85,1552.98 2189.85,1694.27 v1(2289.85,1794.27)
CHARGE_STATUS: H2.6 IC4.1 R18.1 | length 1781.9
  Top Layer w10: H2.6 2244.85,2541.77 2244.85,2101.15 2183.38,2039.67 2183.38,1705.43 2305.76,1583.05 2305.76,1391.58 2348.35,1348.99 2394.57,1348.99 2405.13,1359.55 2451.36,1359.55 2478.72,1332.2 2478.72,1322.38 2514.85,1286.24 IC4.1 2514.85,1181.77 R18.1
CHRATE_1: H2.5 R24.1 | length 2023.2
  Top Layer w10: H2.5 2226.85,2459.77 2226.85,2108.61 2165.38,2047.13 2165.38,1697.97 2273.43,1589.92 2273.43,1378.2 v1(2299.85,1351.77) ; R24.1 2680.4,1017.31 v1(2725.62,1017.31)
  Bottom Layer w10: v1(2299.85,1351.77) 2409.85,1241.77 2409.85,1118.06 2510.6,1017.31 v1(2725.62,1017.31)
CHRATE_2: H2.4 R25.1 | length 1641.8
  Top Layer w10: H2.4 2119.85,2452.76 2208.85,2363.76 2208.85,2116.06 2147.38,2054.59 2147.38,1690.52 2255.43,1582.47 2255.43,1356.91 2299,1313.34 2300.08,1313.34 2329.22,1284.2 2329.22,1248.2 2329.22,1113.51 2399.3,1043.43 2412.41,1043.43 2437.88,1017.95 R25.1
GND: C3.1 C4.1 C5.1 C6.1 C7.1 C8.1 C9.1 C10.1 C11.1 C12.1 C13.1 Designator16.3 H1.3 H1.4 IC3.2 IC4.9 pad.qq Q4.2 Q5.2 Q6.2 R3.1 R12.1 R14.1 R18.2 R19.2 R20.1 R21.1 | length 2452.1
  Top Layer w10: R12.1 v1(2219.22,1407.4) ; C3.1@2229.5,1919.93 C3.1 2231.35,1921.77 v1(2274.85,1921.77) ; v1(2288.58,1659.08) 2288.58,1699.32 R3.1 ; Q4.2 2291.82,1090 2326.7,1055.12 v1(2326.77,1055.12) ; v1(2299.85,2246.77) 2299.85,2200.28 C4.1 ; v1(2359.85,1376.77) C10.1 ; C11.1 v1(2359.85,1789.88) ; v1(2417.42,1071.21) 2494.29,1071.21 v1(2509.85,1086.77) R18.2 ; C9.1 2441.82,1423.78 2479.85,1385.75 v1(2479.85,1381.77) ; Q6.2 2463.71,826.77 v1(2509.85,826.77) ; v1(2519.85,1331.77) 2544.85,1331.77 2567.35,1354.27 2559.85,1361.77 v1(2519.85,1361.77) ; v1(2519.85,1391.77) IC4.9@2574.85,1391.77 ; v1(2519.85,1421.77) 2544.85,1421.77 IC4.9@2574.85,1391.77 ; v1(2612.04,918.96) 2612.04,957.78 R21.1 ; v1(2619.85,1086.77) R19.2 ; v1(2659.85,1346.77) 2619.85,1346.77 IC4.9 ; v1(2659.85,1376.77) IC4.9 ; v1(2659.85,1406.77) 2619.85,1406.77 IC4.9 ; C13.1 2685.44,1909.37 2685.44,1933.47 v1(2704.72,1952.76) ; Q5.2 2679.85,902.91 v1(2679.85,868.9) ; v1(2679.17,1087.36) 2679.17,1124.9 R20.1 ; v1(2739.85,1376.77) C12.1 ; IC4.9@2574.85,1391.77 IC4.9
  Top Layer w20: v1(2354.85,2725.28) 2355.6,2726.02 2404.11,2726.02 C5.1@2404.85,2726.77 ; v1(2360.54,2348.24) 2361.99,2346.79 2361.99,2329.18 2379.59,2311.58 2417.75,2311.58 2434.26,2328.09 IC3.2 v1(2434.26,2403.78) ; C6.1@2479.85,2726.77 v1(2529.85,2726.77)
  Top Layer w25: v1(2234.85,2036.77) 2274.85,2076.77 2274.85,2166.3 2303.36,2194.8 C4.1
  Bottom Layer w10: v1(2509.85,826.77) 2551.98,868.9 v1(2679.85,868.9) ; v1(2612.04,918.96) 2661.07,869.93 2678.82,869.93 v1(2679.85,868.9) ; v1(2679.17,1087.36) 2749.27,1087.36 2759.85,1076.77 2759.85,948.9 v1(2679.85,868.9)
  Bottom Layer w25: 2234.85,2006.77 v1(2234.85,2036.77)
  other v1: 2350.58,2382.96
NetC3_2: C3.2 D1.2 IC2.3 R2.2 | length 246.3
  Top Layer w10: C3.2 2231.82,1983.27 2303.39,2054.84 2304.63,2054.84 D1.2@2341.95,2092.16 ; D1.2 D1.2@2341.95,2092.16 ; 2394.85,2031.77 2394.85,2039.26 D1.2@2341.95,2092.16
  Top Layer w25: IC2.3 IC2.3@2495.17,1976.46 ; R2.2@2599.54,1976.46 R2.2
NetC9_2: C9.2 C10.2 IC4.8 R16.2 | length 210
  Top Layer w20: C10.2 R16.2
  Top Layer w40: C10.2 C9.2 2499.85,1486.77
NetC11_2: C11.2 R16.1 | length 68.8
  Top Layer w20: R16.1 C11.2
NetC12_2: C12.2 IC4.5 R17.1 | length 154.9
  Top Layer w10: IC4.5 2736.62,1483.54 C12.2 2749.85,1496.77 R17.1
NetD2_1: D2.1 IC3.1 L1.2 | length 252.7
  Top Layer w25: IC3.1 2498.28,2355.2 2545.63,2402.55 ; 2539.85,2402.55 2545.63,2402.55 ; L1.2@2674.85,2460.79 2603.87,2460.79 2545.63,2402.55
NetIC3_3: IC3.3 R13.1 R14.2 | length 182.3
  Top Layer w10: IC3.3 2396.86,2412.43 2414.26,2429.84 2414.26,2463.78 2419.79,2469.3 R14.2
NetIC4_2: IC4.2 R15.2 | length 95.3
  Top Layer w10: IC4.2 2564.85,1181.77 R15.2
NetIC4_3: IC4.3 R19.1 | length 95.3
  Top Layer w10: IC4.3 2614.85,1181.77 R19.1
NetIC4_4: IC4.4 R20.2 | length 99.4
  Top Layer w10: IC4.4 2664.85,1211.77 2679.85,1196.77 R20.2
NetIC4_6: IC4.6 R21.2 R22.2 R23.2 | length 729.6
  Top Layer w10: R23.2 R22.2 R21.2 2619.85,1046.77 2631.07,1057.99 2690.5,1057.99 2701.07,1068.56 2701.07,1068.69 2724.23,1091.85 2724.23,1351.35 2689.85,1385.72 2689.85,1421.77 2673.1,1438.52 2639.88,1438.52 2623.63,1454.77 2623.63,1474.76 IC4.6
NetIC4_7: IC4.7 L2.1 | length 75.3
  Top Layer w25: IC4.7 2564.85,1551.77 2569.85,1556.77
NetQ3_1: Q3.1 R8.1 R9.2 | length 132.5
  Top Layer w10: Q3.1 2433.22,1231.4 R8.1 R9.2
NetQ3_3: Q3.3 R10.2 | length 116.6
  Top Layer w10: R10.2 2249.22,1197.4 2289.22,1237.4 Q3.3
NetQ4_1: Q4.1 R11.1 | length 82
  Top Layer w10: R11.1 2241.01,1137.4 2268.41,1164.8 Q4.1
NetQ4_3: Q4.3 R9.1 | length 71.1
  Top Layer w10: Q4.3 2438.04,1127.4 R9.1
NetQ5_1: Q5.1 R24.2 | length 170.3
  Top Layer w10: Q5.1 2676.62,829.37 2665.88,840.12 2665.88,842.09 2640.82,867.14 2640.82,926.79 2666.15,952.12 2666.15,953.86 2677.88,965.59 R24.2
NetQ5_3: Q5.3 R22.1 | length 115.4
  Top Layer w10: R22.1 2559.85,930.45 2599.85,890.45 Q5.3
NetQ6_1: Q6.1 R25.2 | length 71.4
  Top Layer w10: R25.2 2439.85,946.77 2461.11,925.51 Q6.1
NetQ6_3: Q6.3 R23.1 | length 115.4
  Top Layer w10: R23.1 2499.85,937.71 2539.85,897.71 Q6.3
V_BAT: C13.2 Designator16.1 Designator16.2 IC2.2 L2.2 Q3.2 R8.2 R15.1 R17.2 | length 1680.2
  Top Layer w10: Q3.2 2400.7,1303.4 2415.52,1288.58 R8.2 2439.85,1289.21 v1(2439.85,1331.77) ; v1(2569.85,1086.77) R15.1 ; 2664.81,1771.81 2749.85,1686.77 R17.2 2755.44,1606.77 2779.85,1606.77 2789.85,1596.77 2789.85,1376.77 2749.85,1336.77 2749.85,1081.52 2729.85,1061.52 v1(2729.85,1056.77)
  Top Layer w25: IC2.2 C13.2@2609.22,1897.4 ; L2.2@2607.2,1814.8 2609.85,1817.46 C13.2
  Bottom Layer w10: v1(2439.85,1331.77) 2439.85,1114.93 2498.01,1056.77 2539.85,1056.77 v1(2569.85,1086.77) 2599.85,1056.77 v1(2729.85,1056.77)
V_USB: D1.1 H1.1 H1.2 IC2.1 R1.2 | length 1314.4
  Top Layer w10: R1.2 2291.03,1871.95 2341.95,1922.87 2341.95,1927.8 D1.1 ; 2418.37,1897.97 2419.85,1899.46 v1(2419.85,1933.91) ; IC2.1 IC2.1@2457.62,1897.57 ; v1(2458.41,1933.67) 2458.2,1933.46 2458.2,1898.59 2457.43,1897.82 2457.62,1897.63 IC2.1@2457.62,1897.57 ; v1(2497.87,1933.91) 2471.42,1907.46 2467.51,1907.46 IC2.1@2457.62,1897.57
  Top Layer w25: D1.1@2341.95,1927.8 2371.78,1897.97 2418.37,1897.97 IC2.1@2456.88,1897.97 ; IC2.1@2457.62,1897.63 IC2.1@2457.94,1897.95
  Bottom Layer w10: v1(2458.41,1933.67) 2458.41,1940.33 v1@2459.85,1941.77
  Bottom Layer w40: 2244.85,2746.77 2244.85,2136.77 2326.03,2055.6 2406.42,2055.6 2429.85,2032.17 2429.85,1971.77 v1@2459.85,1941.77
pads on no net: IC3.6

## Polygon pours and split planes (outlines as drawn)
V_BAT on Top Layer "NONET_L01_P-001" (solid, remove dead copper, pour order 13): 2679.93,1734.1 2832.52,1734.1 2834.65,1736.22 2834.65,1913.39 2803.15,1944.88 2728.35,1944.88 2706.79,1923.32 2706.79,1858.29 2680.99,1832.49
+5V on Top Layer "NONET_L01_P-001" (solid, remove dead copper, pour order 10): 2659.28,2621.2 2694.85,2656.77 2694.85,2871.77 2674.85,2891.77 2509.85,2891.77 2494.85,2876.77 2494.85,2793.06 2552.17,2735.75 2552.17,2704.09 2529.85,2681.77 2529.85,2631.59
GND on Top Layer "GND_L01_P006" (solid, remove dead copper, pour order 6): 2349.85,2471.77 2392.71,2436.58 2514.26,2436.58 2514.26,2325.99 2354.26,2325.99 2277.64,2402.61 2277.64,2448.55 2330.29,2487.84
+V_SYS on Top Layer "+V_SYS_L01_P001" (solid, remove dead copper, pour order 1): 2277.4,2325.99 2277.4,2276.06 2328.7,2241.94 2392.15,2170.36 2508.64,2170.36 2534.26,2195.99 2534.26,2285.99 2514.26,2305.99 2334.26,2305.99 2314.26,2325.99
+5V on Top Layer "+5V_L01_P002" (solid, remove dead copper, pour order 2): 2384.26,2655.99 2304.26,2575.99 2304.26,2495.99 2514.26,2495.99 2524.26,2505.99 2524.26,2565.99 2564.26,2605.99 2644.26,2605.99 2664.26,2625.99 2664.26,2655.99 2644.26,2675.99 2394.26,2675.99 2384.26,2665.99
NetD2_1 on Top Layer "NETD2_1_L01_P003" (solid, remove dead copper, pour order 3): 2594.63,2536.38 2594.63,2451.77 2674.63,2451.77 2674.63,2546.38
+V_SYS on Top Layer "NONET_L01_P-001" (solid, remove dead copper, pour order 0): 2629.85,1949.22 2669.7,1949.22 2779.85,2059.38 2779.85,2196.77 2509.6,2196.77 2509.6,2073.97 2541.79,2041.77 2599.85,2041.77 2629.85,2011.77
NetC3_2 on Top Layer "NONET_L01_P-001" (solid, remove dead copper, pour order 7): 2452.52,2021.62 2384.52,2146.01 2249.85,2001.62 2247.62,1957.72 2272.99,1958.18 2276.79,1965.31 2277.09,2001.62 2391.88,2001.62 2409.96,2001.62 2409.96,1961.62 2609.96,1961.62 2609.96,2011.62 2599.96,2021.62
GND on Bottom Layer "NONET_L01_P-001" (solid, remove dead copper, pour order 11): 2069.85,2891.77 2069.85,801.77 2149.85,801.77 2149.85,1876.77 2264.85,1991.77 2264.85,2031.77 2169.85,2126.77 2169.85,2716.77 2094.85,2791.77 2094.85,2891.77
GND on Bottom Layer "NONET_L01_P-001" (solid, remove dead copper, pour order 9): 2274.85,2216.77 2384.85,2106.77 2489.85,2106.77 2528.11,2068.51 2528.11,1996.77 2804.85,1996.77 2819.85,2011.77 2819.85,2891.77 2294.85,2891.77 2294.85,2779.85 2274.85,2759.85 2274.85,2246.77
V_USB on Bottom Layer "NONET_L01_P-001" (solid, remove dead copper, pour order 4): 2094.85,2891.77 2294.85,2891.77 2294.85,2791.77 2264.85,2761.77 2264.85,2206.77 2374.85,2096.77 2484.85,2096.77 2519.85,2061.77 2504.85,2046.77 2474.85,2046.77 2459.85,2031.77 2279.25,2031.77 2169.85,2141.17 2169.85,2711.77 2094.85,2786.77 2094.85,2796.77
V_USB on Bottom Layer "NONET_L01_P-001" (solid, remove dead copper, pour order 5): 2399.85,2061.77 2399.85,1911.77 2519.85,1911.77 2519.85,2061.77
GND on Bottom Layer "NONET_L01_P-001" (solid, remove dead copper, pour order 8): 2139.85,2021.77 2819.85,2021.77 2819.85,801.77 2139.85,801.77

## Silkscreen, mask and mechanical layers (free items; w line width, h text height)
Top Overlay:
  circle w6: c2269.85,916.77 r118.67
  lines w5: 2268.99,2171.38 2410.72,2171.38 ; 2466.78,1101.81 2414.85,1051.77 2354.85,1051.77 2174.85,1051.77 2174.85,1406.77 2249.85,1406.77 2314.85,1346.77 2414.85,1346.77 2466.78,1312.99
OUTLINE:
  lines w5: 2047.24,787.4 2834.65,787.4 2834.65,2913.39 2047.24,2913.39 2047.24,2893.7 2047.24,787.4